# Altium PCB ILAS_PCB.PcbDoc
Units mil, origin at the board's own origin, x right, y up, seen from the top; angles counter-clockwise.
Board outline 1350 x 450 mil, 2 copper layers (Top Layer, Bottom Layer); 8 components, 6 nets, 18 pads, 0 vias.
Unrouted connection lines stored in the file: 2.
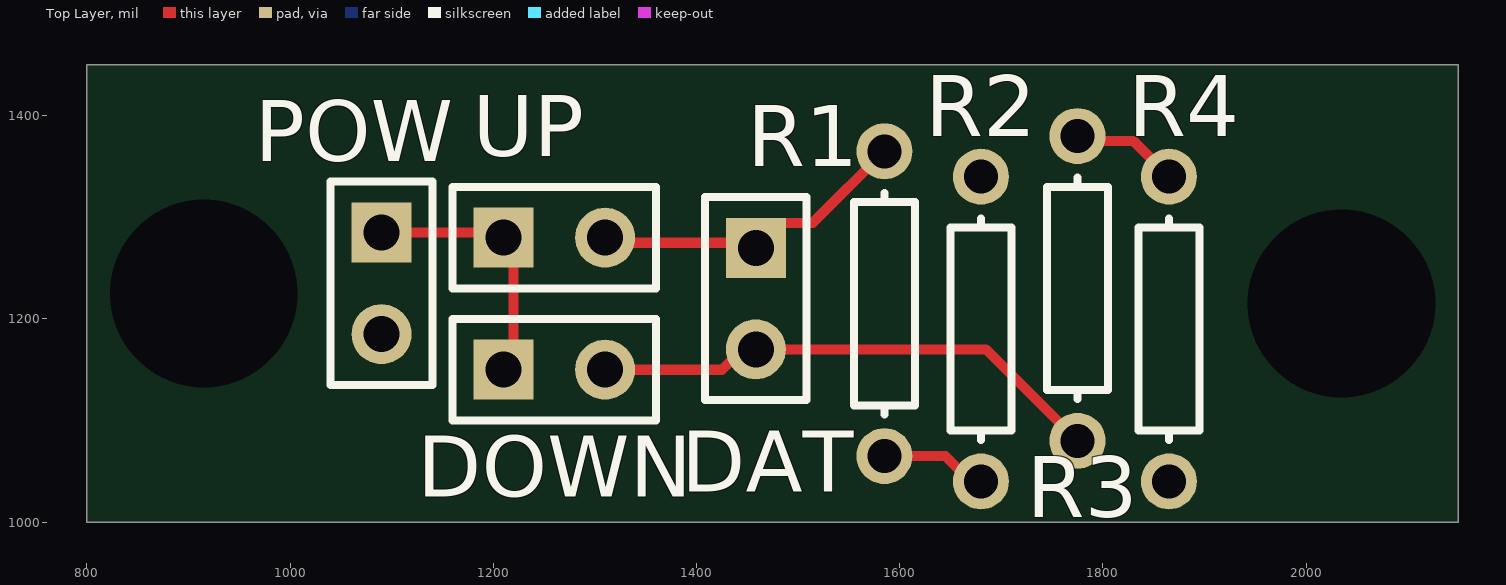
[diagram p0: Top Layer view]
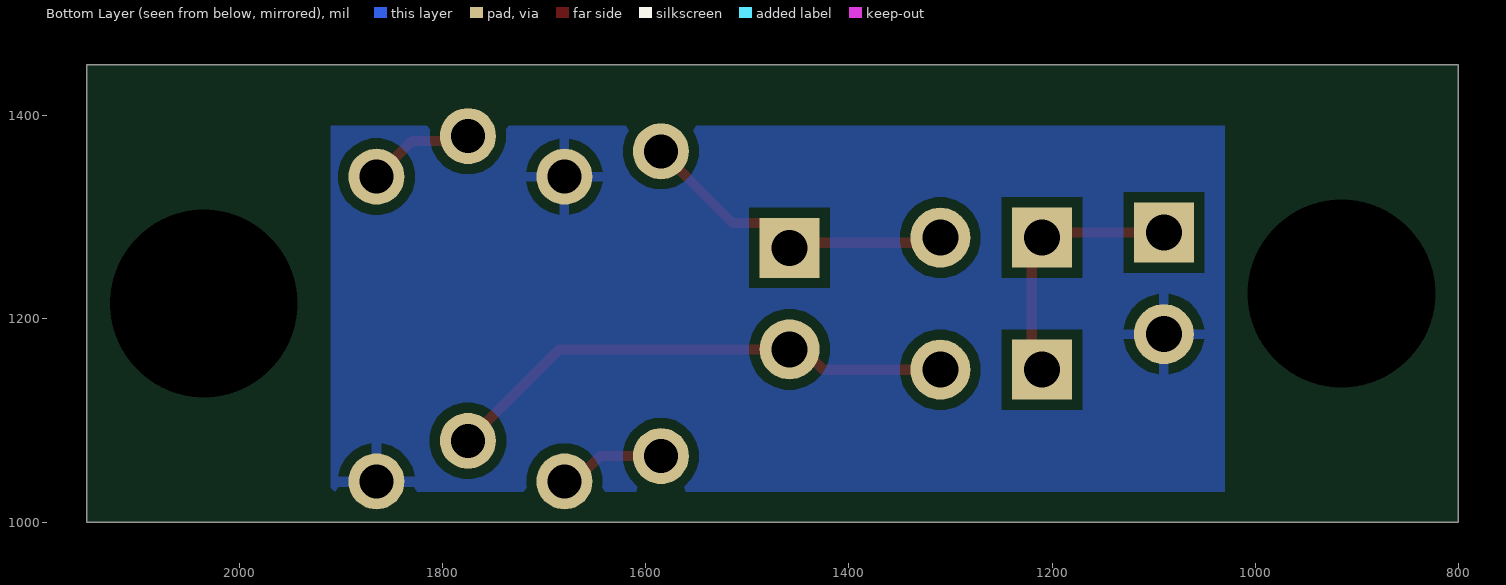
[diagram p1: Bottom Layer view, seen from below]

## Layer stack, top to bottom
Top Solder: solder mask 0.4, Solder Resist, Dk 3.5
Top Layer: signal copper 1.4
Dielectric 1: dielectric 12.6, FR-4, Dk 4.8
Bottom Layer: signal copper 1.4
Bottom Solder: solder mask 0.4, Solder Resist, Dk 3.5

## Board outline
800,1000 2150,1000 2150,1450 800,1450

## Design rules (kind name [scope] priority, off if disabled: settings)
Clearance [All] p1: gap=10 ignorepadtopadclearanceinfootprint=FALSE except(0: Arc-Hole Track-Hole SMDPad-Hole THPad-Hole Via-Hole Fill-Hole Poly-Hole Region-Hole Text-Hole)
PolygonConnect [All] p1: connectstyle=Relief reliefconductorwidth=10 reliefentries=4 polygonreliefangle="90 Angle" airgapwidth=10
RoutingVias [All] p1: holewidth=28 width=50 viastyle="Through Hole" minholewidth=28 minwidth=50 maxholewidth=28 maxwidth=50
SolderMaskExpansion [All] p1: expansion=4 istentingtop=FALSE
Width [All] p1: maxlimit=10 minlimit=10 preferedwidth=10
30 further rules are at their usual default settings.

## Components (designator, comment, footprint, x,y, rotation, side; value= is the part's Value field where it differs from the comment)
DAT "Header 2" HDR1X2 1458.36,1270 r270 top (schematic designator DATA)
DOWN "Header 2" HDR1X2 1210,1150 r0 top (schematic designator "DOW BUT")
POW "Header 2" HDR1X2 1090,1285 r270 top (schematic designator "Ard POW")
R1 "Res1" AXIAL-0.3 1585,1215 r270 top value=5K
R2 "Res1" AXIAL-0.3 1680,1190 r90 top value=5K
R3 "Res1" AXIAL-0.3 1775,1230 r90 top value=5K
R4 "Res1" AXIAL-0.3 1865,1190 r270 top value=5K
UP "Header 2" HDR1X2 1210,1280 r0 top (schematic designator "UP BUT")

## Footprints (in the part's own frame and the unit in brackets; to place one, negate y for a bottom-side part, rotate by r counter-clockwise, add the part's x,y. Pads: shape width x height; smd on the part's side, far side on the other; paste and mask are expansions set on the pad)
AXIAL-0.3 [mm] "Axial Device, Thru-Hole; 2 Leads; 0.3 in Pin Spacing"
  round 1.4 hole 0.85: 1(-3.81,0) 2(3.81,0)
  silkscreen extent -2.77,-0.76 2.77,0.76
HDR1X2 [mm] "Connector; Header; 2 Position"
  rect 1.5x1.5 hole 0.9: 1(0,0)
  round 1.5 hole 0.9: 2(2.54,0)
  silkscreen extent -1.27,-1.27 3.81,1.27

## Part data
DAT DOWN POW UP: "Header, 2-Pin", LatestRevisionDate=17-Jul-2002, LatestRevisionNote="Re-released for DXP Platform.", Publisher="Altium Limited"
R1 R2 R3 R4: "Resistor", LatestRevisionDate=17-Jul-2002, LatestRevisionNote="Re-released for DXP Platform.", PackageDescription="Axial Device, Thru-Hole; 2 Leads; 0.3 in Pin Spacing", PackageReference=AXIAL-0.3, Published=8-Jun-2000, Publisher="Altium Limited"

## Free pads (board coordinates)
  round 141.73 hole 185 mask+5: 2(915,1225) 2(2035,1215)

## Nets (pads, with @x,y where several pads share a name; then routed paths per layer and width w, separated by ;. In a path a pad name is that pad's centre, name@x,y a point inside that pad or via, vN(x,y) a via of type N, cw(c..) or ccw(c..) an arc to the next point about the centre after c; other vN are vias at no path point)
GND: pad.2@2035,1215 POW.2 R2.2 R4.2
"NetArd POW_1": DOWN.1 POW.1 UP.1 | length 260
  Top Layer w10: POW.1 1220,1285 DOWN.1@1220,1155
NetDATA_1: DAT.1 R1.1 UP.2 | length 303.1
  Top Layer w10: UP.2@1323.36,1275 1453.36,1275 DAT.1 1482.89,1294.53 1514.53,1294.53 R1.1
NetDATA_2: DAT.2 DOWN.2 R3.1 | length 512.2
  Top Layer w10: DOWN.2@1308.36,1150 1425.09,1150 1445.09,1170 DAT.2 1685,1170 R3.1
NetR1_2: R1.2 R2.1 | length 105.4
  Top Layer w10: R1.2 1644.81,1065 1669.81,1040 R2.1
NetR3_2: R3.2 R4.1 | length 106.6
  Top Layer w10: R3.2 1779.77,1375.23 1829.77,1375.23 R4.1

## Polygon pours and split planes (outlines as drawn)
GND on Bottom Layer "GND_L02_P001" (solid, pour order 1): 1030,1390 1030,1030 1910,1030 1910,1390